# Altium PCB finalproject_selfroute.PcbDoc
Units mil, origin at the board's own origin, x right, y up, seen from the top; angles counter-clockwise.
Board outline 3850 x 3500 mil, 2 copper layers (Top Layer, Bottom Layer); 22 components, 43 nets, 155 pads, 0 vias.
Unrouted connection lines stored in the file: 95.
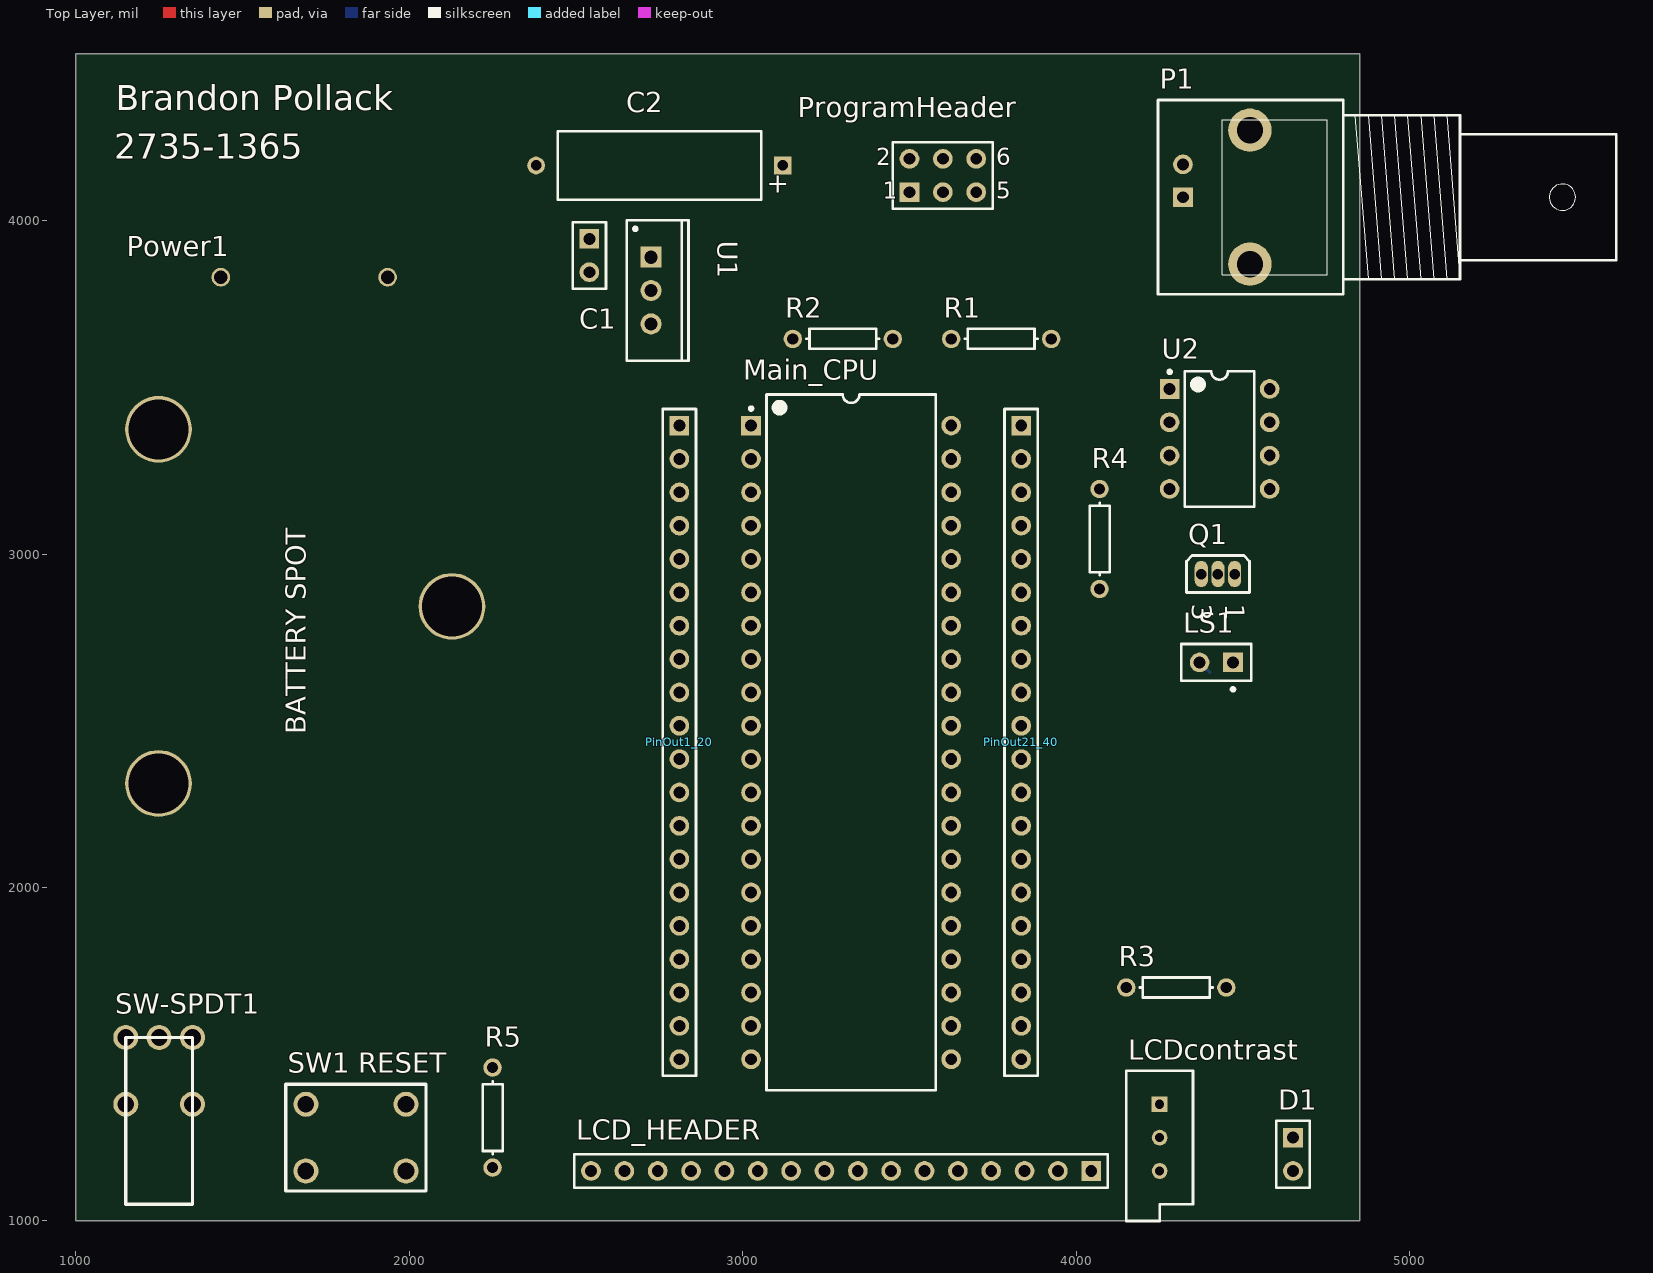
[diagram p0: Top Layer view]
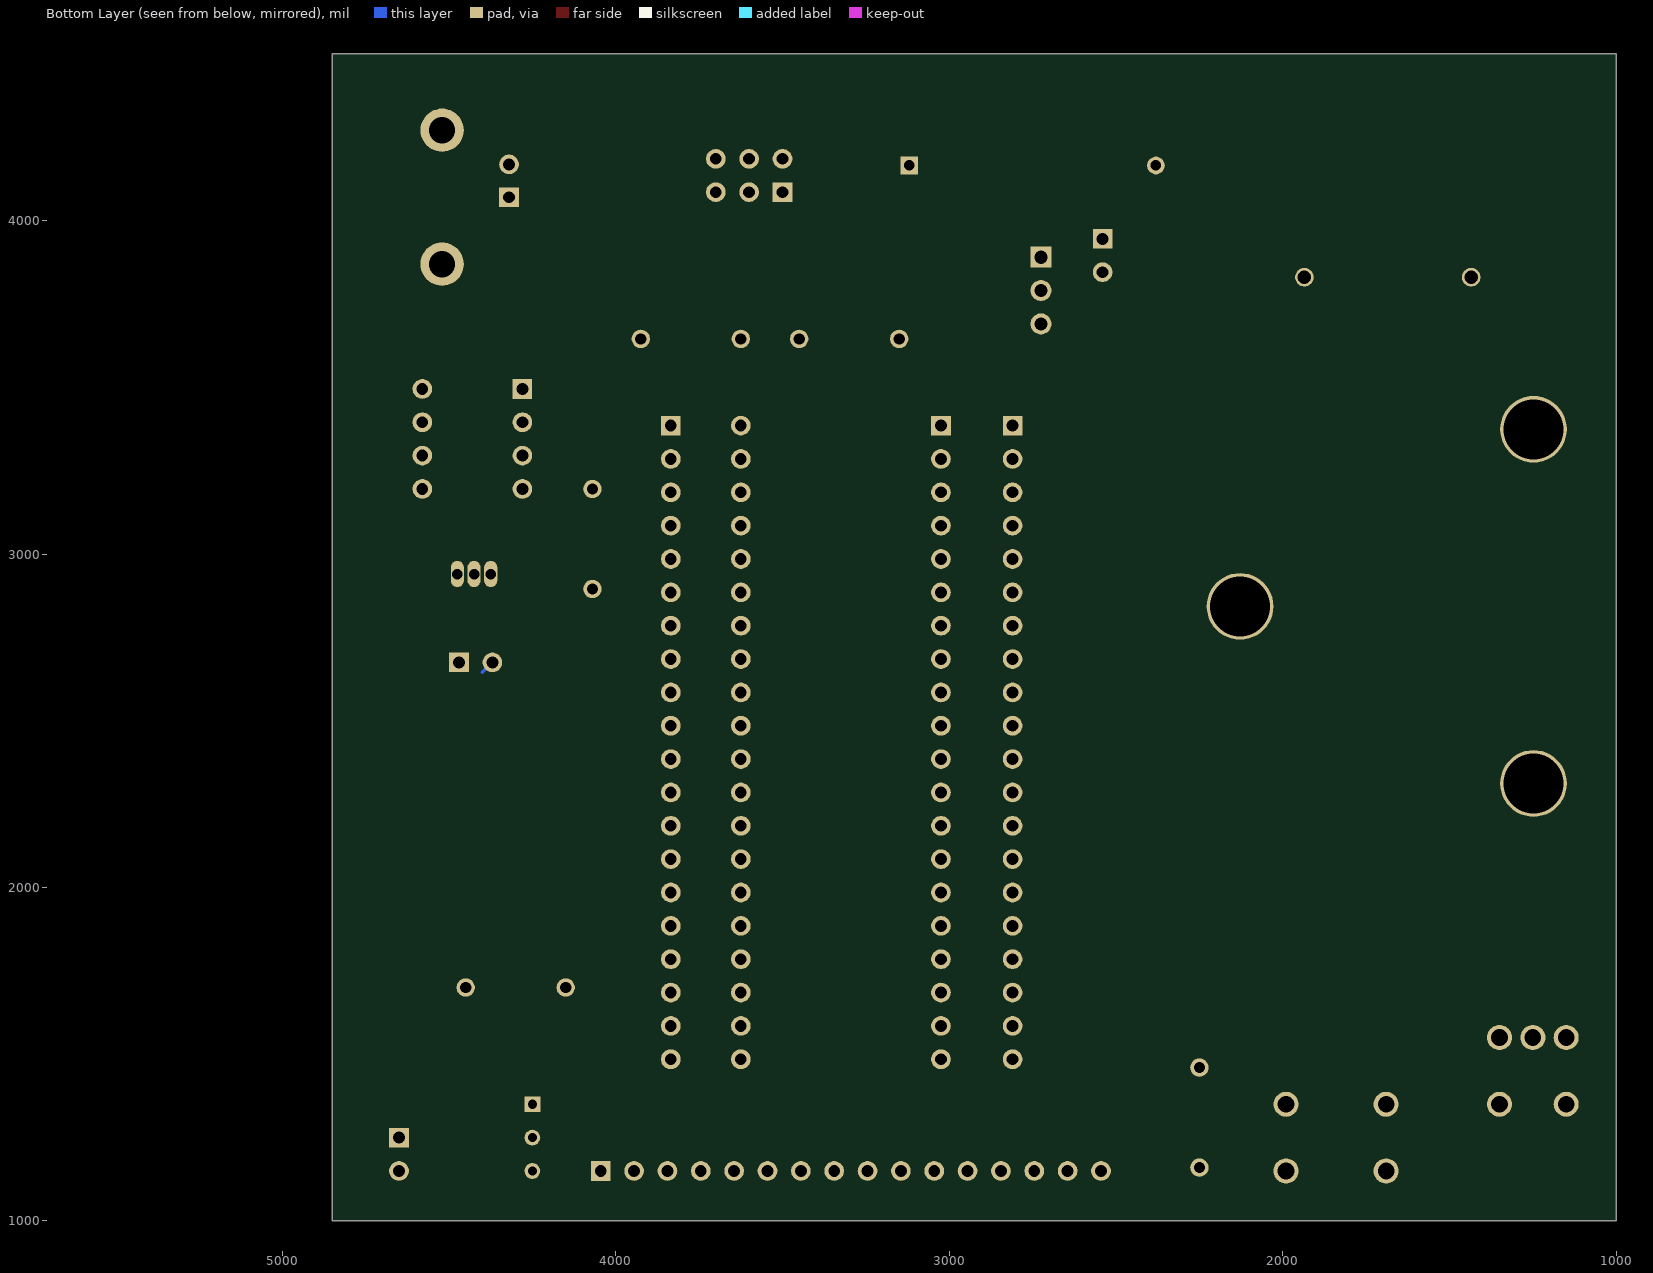
[diagram p1: Bottom Layer view, seen from below]

## Layer stack, top to bottom
Top Layer: signal copper 1.4
Dielectric: core 12.6, FR-4, Dk 4.8
Bottom Layer: signal copper 1.4

## Board outline
1000,1000 1000,4500 4850,4500 4850,1000 1000,1000

## Design rules (kind name [scope] priority, off if disabled: settings)
Clearance Poly [InPolygon] p1: gap=20
Clearance [All] p2: gap=10
PolygonConnect [All] p1: connectstyle=Relief reliefconductorwidth=10 reliefentries=4 polygonreliefangle="90 Angle" airgapwidth=10
RoutingVias [All] p1: holewidth=28 width=50 viastyle="Through Hole" minholewidth=28 minwidth=50 maxholewidth=28 maxwidth=50
ShortCircuit [All] p1: allowed=TRUE
SilkscreenOverComponentPads [All] p1: minsilkscreentomaskgap=10
SolderMaskExpansion [All] p1: expansion=4
Width [All] p1: maxlimit=100 minlimit=7 preferedwidth=10
26 further rules are at their usual default settings.

## Components (designator, comment, footprint, x,y, rotation, side; value= is the part's Value field where it differs from the comment)
C1 "Cap Pol1" HDR1X2 2540,3945 r270 top
C2 "Cap" CSR13-B 2750,4165 r180 top
D1 "LED0" HDR1X2 4650,1250 r270 top
LCD_HEADER "Header 16" HDR1X16 4045,1150 r180 top
LCDcontrast "RPot" VR5 4250,1250 r270 top
LS1 "Speaker" PIN2 4470,2675 r180 top
Main_CPU "ATmega324PA-PU" 40P6 3325,2435 r0 top
P1 "BNC FOR FREQGEN" "BNC_RA CON" 4320,4070 r180 top
PinOut1_20 "Header 20" HDR1X20 2810,3385 r270 top
PinOut21_40 "Header 20" HDR1X20 3835,3385 r270 top
Power1 "Battery Holder 9V" "PCBComponent_1 - duplicate" 1435,3830 r90 top
ProgramHeader "Header 3X2" HDR2X3 3500,4085 r0 top
Q1 "MOSFET-N" E3 4425,2940 r270 top
R1 "Res1" AXIAL-0.3 3775,3645 r0 top
R2 "Res2" AXIAL-0.3 3300,3645 r0 top
R3 "Res1" AXIAL-0.3 4300,1700 r0 top
R4 "Res1" AXIAL-0.3 4070,3045 r270 top
R5 "Res1" AXIAL-0.3 2250,1310 r90 top
"SW1 RESET" "push button switch" SW-PUSH-4 1990,1350 r180 top (schematic designator SW1)
SW-SPDT1 "Component_1" PCBComponent_1 1250,1550 r0 top
U1 "LM2940T-5.0" T03B 2725,3790 r270 top
U2 "LTC1661" DIP-8 4430,3345 r0 top

## Footprints (in the part's own frame and the unit in brackets; to place one, negate y for a bottom-side part, rotate by r counter-clockwise, add the part's x,y. Pads: shape width x height; smd on the part's side, far side on the other; paste and mask are expansions set on the pad)
40P6 [mm] "DIP, 40-Leads, Row Spacing 15.24mm, Pitch 2.54mm, Body 52.2x13.95mm"
  rect 1.5x1.5 hole 0.9: 1(-7.62,24.13)
  round 1.5 hole 0.9: 2(-7.62,21.59) 3(-7.62,19.05) 4(-7.62,16.51) 5(-7.62,13.97) 6(-7.62,11.43) 7(-7.62,8.89) 8(-7.62,6.35) 9(-7.62,3.81) 10(-7.62,1.27) 11(-7.62,-1.27) 12(-7.62,-3.81) 13(-7.62,-6.35) 14(-7.62,-8.89) 15(-7.62,-11.43) 16(-7.62,-13.97) 17(-7.62,-16.51) 18(-7.62,-19.05) 19(-7.62,-21.59) 20(-7.62,-24.13) 21(7.62,-24.13) 22(7.62,-21.59) 23(7.62,-19.05) 24(7.62,-16.51) 25(7.62,-13.97) 26(7.62,-11.43) 27(7.62,-8.89) 28(7.62,-6.35) 29(7.62,-3.81) 30(7.62,-1.27) 31(7.62,1.27) 32(7.62,3.81) 33(7.62,6.35) 34(7.62,8.89) 35(7.62,11.43) 36(7.62,13.97) 37(7.62,16.51) 38(7.62,19.05) 39(7.62,21.59) 40(7.62,24.13)
  silkscreen extent -7.74,-26.5 6.45,26.5, body extent -7.05,-26.47 7.05,26.47, height 4.83
AXIAL-0.3 [mm] "Axial Device, Thru-Hole; 2 Leads; 0.3 in Pin Spacing"
  round 1.4 hole 0.85: 1(-3.81,0) 2(3.81,0)
  silkscreen extent -2.77,-0.76 2.77,0.76
"BNC_RA CON" [mm] "Connector; BNC Elbow"
  rect 1.5x1.5 hole 0.9: 1(0,0)
  round 3.3 hole 2: 2(-5.1,5.1) 2(-5.1,-5.1)
  round 1.5 hole 0.9: 2(0,-2.5)
  silkscreen extent -33,-7.4 1.9,7.4
CSR13-B [mm] "Capacitor, Axial, Polarised; Body 12.8 x 5.1 mm (LxDia. max), Lead Dia. 0.51 mm (typ)"
  rect 1.35x1.35 hole 0.8: 1(-9.39,0)
  round 1.35 hole 0.8: 2(9.39,0)
  silkscreen extent -7.75,-2.6 7.75,2.6
DIP-8 [mm] "DIP; 8 Leads; Row Spacing 7.62 mm; Pitch 2.54 mm"
  rect 1.5x1.5 hole 0.9: 1(-3.81,3.81)
  round 1.5 hole 0.9: 2(-3.81,1.27) 3(-3.81,-1.27) 4(-3.81,-3.81) 5(3.81,-3.81) 6(3.81,-1.27) 7(3.81,1.27) 8(3.81,3.81)
  silkscreen extent -3.93,-5.15 2.65,5.23, body extent -3.6,-5.15 3.6,5.15, height 5.08
E3 [mm] "TO, Flat Index; 3 In-Line, Axial Leads; Body Dia. 4.6mm; Lead Dia. 0.5 mm (max)"
  oval 2x1 hole 0.8: 1(0,1.27) 2(0,0) 3(0,-1.27)
  silkscreen extent -1.41,-2.41 1.41,2.41
HDR1X2 [mm] "Connector; Header; 2 Position"
  rect 1.5x1.5 hole 0.9: 1(0,0)
  round 1.5 hole 0.9: 2(2.54,0)
  silkscreen extent -1.27,-1.27 3.81,1.27
HDR1X16 [mm] "Connector; Header; 16 Position"
  rect 1.5x1.5 hole 0.9: 1(0,0)
  round 1.5 hole 0.9: 2(2.54,0) 3(5.08,0) 4(7.62,0) 5(10.16,0) 6(12.7,0) 7(15.24,0) 8(17.78,0) 9(20.32,0) 10(22.86,0) 11(25.4,0) 12(27.94,0) 13(30.48,0) 14(33.02,0) 15(35.56,0) 16(38.1,0)
  silkscreen extent -1.27,-1.27 39.37,1.27
HDR1X20 [mm] "Connector; Header; 20 Position"
  rect 1.5x1.5 hole 0.9: 1(0,0)
  round 1.5 hole 0.9: 2(2.54,0) 3(5.08,0) 4(7.62,0) 5(10.16,0) 6(12.7,0) 7(15.24,0) 8(17.78,0) 9(20.32,0) 10(22.86,0) 11(25.4,0) 12(27.94,0) 13(30.48,0) 14(33.02,0) 15(35.56,0) 16(38.1,0) 17(40.64,0) 18(43.18,0) 19(45.72,0) 20(48.26,0)
  silkscreen extent -1.27,-1.27 49.53,1.27
HDR2X3 [mm] "Connector; Header; 3x2 Position"
  rect 1.5x1.5 hole 0.9: 1(0,0)
  round 1.5 hole 0.9: 2(0,2.54) 3(2.54,0) 4(2.54,2.54) 5(5.08,0) 6(5.08,2.54)
  silkscreen extent -1.27,-1.27 6.35,3.81
PCBComponent_1 [mil]
  round 75 hole 50: 0(-100,0) 1(100,0) 2(0,0) 3(-100,-200) 3(100,-200)
  silkscreen extent -100,-500 100,0
"PCBComponent_1 - duplicate" [mil]
  round 56 hole 40: 1(0,-500) 2(0,0)
  round 200 hole 180: 3(-1518,187) 3(-987,-693) 3(-456,187)
PIN2 [mm] "Photosensitive Diode; 2 Leads"
  rect 1.5x1.5 hole 0.9: 1(0,0)
  round 1.5 hole 0.9: 2(2.54,0)
  silkscreen extent -1.4,-1.4 3.94,2.17
SW-PUSH-4 [mil]
  round 75 hole 50: 1(0,200) 1(300,200) 2(0,0) 2(300,0)
  silkscreen extent -60,-60 360,260
T03B [mm] "TO, Thru-Hole, Vertical, Heatsink Mounted; 3 In-Line Leads; Pitch 2.54 mm"
  rect 1.6x1.6 hole 1: 1(-2.54,0)
  round 1.6 hole 1: 2(0,0) 3(2.54,0)
  silkscreen extent -5.35,-1.85 5.35,2.85, body extent -5.4,-1.9 5.4,2.9, height 19.4
VR5 [mm] "Thru-Hole; 3 Leads"
  rect 1.2x1.2 hole 0.7: 1(-2.54,0)
  round 1.2 hole 0.7: 2(0,0) 3(2.54,0)
  silkscreen extent -5.08,-2.54 6.35,2.54

## Part data
C1: "Polarized Capacitor (Radial)"
C2: "Capacitor"
D1: "Typical INFRARED GaAs LED"
LCD_HEADER: "Header, 16-Pin"
LCDcontrast: "Potentiometer"
LS1: "Loudspeaker"
Main_CPU: "8-bit AVR Microcontroller, 32KB Flash, 1KB EEPROM, 2KB SRAM, 40-pin PDIP, Industrial Grade (-40°C to 85°C)"
P1: library part BNC, "BNC Elbow Connector"
PinOut1_20 PinOut21_40: "Header, 20-Pin"
ProgramHeader: "Header, 3-Pin, Dual row"
Q1: "N-Channel MOSFET"
R1 R3 R4 R5: "Resistor"
R2: library part Res1, "Resistor"
"SW1 RESET": library part SW-PUSH
U1: "1A Low Dropout Regulator, 3-pin TO-220"
U2: library part "Header 4X2", "Header, 4-Pin, Dual row"

## Nets (pads, with @x,y where several pads share a name; then routed paths per layer and width w, separated by ;. In a path a pad name is that pad's centre, name@x,y a point inside that pad or via, vN(x,y) a via of type N, cw(c..) or ccw(c..) an arc to the next point about the centre after c; other vN are vias at no path point)
+5VDC: C2.2 LCD_HEADER.2 LCDcontrast.1 Main_CPU.10 Main_CPU.30 PinOut1_20.10 PinOut21_40.11 ProgramHeader.2 Q1.1 R5.2 U1.3 U2.6 U2.7
+9VDC: Power1.1 R1.2 SW-SPDT1.1
ADC: Main_CPU.40 PinOut21_40.1 R1.1 R2.2
AIN: Main_CPU.3 P1.1 PinOut1_20.3
AREF: Main_CPU.32 PinOut21_40.9
DAC_TO_MOSFET: Q1.2 U2.2
GND: "SW1 RESET.1" C1.2 C2.1 D1.2 LCD_HEADER.1 LCDcontrast.3 LS1.2 Main_CPU.4 Main_CPU.11 Main_CPU.31 P1.2 PinOut1_20.4 PinOut1_20.11 PinOut21_40.10 Power1.2 ProgramHeader.6 R2.1 R4.1 R5.1 U1.2 U2.4 | length 42.4
  Bottom Layer w10: LS1.2 4400,2645
LCD_D4: LCD_HEADER.11 Main_CPU.22 PinOut21_40.19
LCD_D5: LCD_HEADER.12 Main_CPU.23 PinOut21_40.18
LCD_D6: LCD_HEADER.13 Main_CPU.24 PinOut21_40.17
LCD_D7: LCD_HEADER.14 Main_CPU.25 PinOut21_40.16
LCD_E: LCD_HEADER.6 Main_CPU.29 PinOut21_40.12
LCD_RS: LCD_HEADER.4 Main_CPU.27 PinOut21_40.14
LCD_RW: LCD_HEADER.5 Main_CPU.26 PinOut21_40.15
LCD_VO: LCD_HEADER.3 LCDcontrast.2
MISO: Main_CPU.7 PinOut1_20.7 ProgramHeader.1
MOSI: Main_CPU.6 PinOut1_20.6 ProgramHeader.4 U2.5
NetC1_1: C1.1 SW-SPDT1.2 U1.1
NetD1_1: D1.1 R3.2
NetLS1_1: LS1.1 Q1.3 R4.2
PA1: Main_CPU.39 PinOut21_40.2
PA2: Main_CPU.38 PinOut21_40.3
PA3: Main_CPU.37 PinOut21_40.4
PA4: Main_CPU.36 PinOut21_40.5
PA5: Main_CPU.35 PinOut21_40.6
PA6: Main_CPU.34 PinOut21_40.7
PA7: Main_CPU.33 PinOut21_40.8
PB0: Main_CPU.1 PinOut1_20.1
PB1: Main_CPU.2 PinOut1_20.2
PC6: PinOut21_40.13
PD0: Main_CPU.14 PinOut1_20.14
PD1: Main_CPU.15 PinOut1_20.15
PD2: Main_CPU.16 PinOut1_20.16
PD3: Main_CPU.17 PinOut1_20.17
PD4: Main_CPU.18 PinOut1_20.18
PD5: Main_CPU.19 PinOut1_20.19
PD6: Main_CPU.20 PinOut1_20.20
PD7: Main_CPU.21 PinOut21_40.20 R3.1
RESET: "SW1 RESET.2" Main_CPU.9 ProgramHeader.5
SCK: Main_CPU.8 PinOut1_20.8 ProgramHeader.3 U2.3
SS: Main_CPU.5 PinOut1_20.5 U2.1
XTAL1: PinOut1_20.13
XTAL2: PinOut1_20.12
pads on no net: LCD_HEADER.7 LCD_HEADER.8 LCD_HEADER.9 LCD_HEADER.10 LCD_HEADER.15 LCD_HEADER.16 Main_CPU.12 Main_CPU.13 Main_CPU.28 PinOut1_20.9 Power1.3 SW-SPDT1.0 SW-SPDT1.3 U2.8

## Silkscreen, mask and mechanical layers (free items; w line width, h text height)
Top Overlay:
  text "Brandon Pollack" at 1120,4330 h75
  text "2735-1365" at 1115,4185 h75

## Text inside footprints (layer, text, board x,y; h text height)
C2: Top Overlay "+" at 3139.37,4133.5 h59.06 r180
Power1: Top Overlay "BATTERY SPOT" at 1690,2460 h60 r90
ProgramHeader: Top Overlay "6" at 3760,4165 h50; Top Overlay "5" at 3760,4065 h50; Top Overlay "2" at 3400,4165 h50; Top Overlay "1" at 3420,4065 h50
Q1: Top Overlay "1" at 4446.85,2850.43 h59.05 r270; Top Overlay "3" at 4347.72,2850.43 h59.05 r270